# Altium PCB ade7753_relay.PcbDoc
Units mil, origin at the board's own origin, x right, y up, seen from the top; angles counter-clockwise.
Board outline 3900 x 2250 mil, 2 copper layers (Top Layer, Bottom Layer); 37 components, 53 nets, 112 pads, 0 vias.
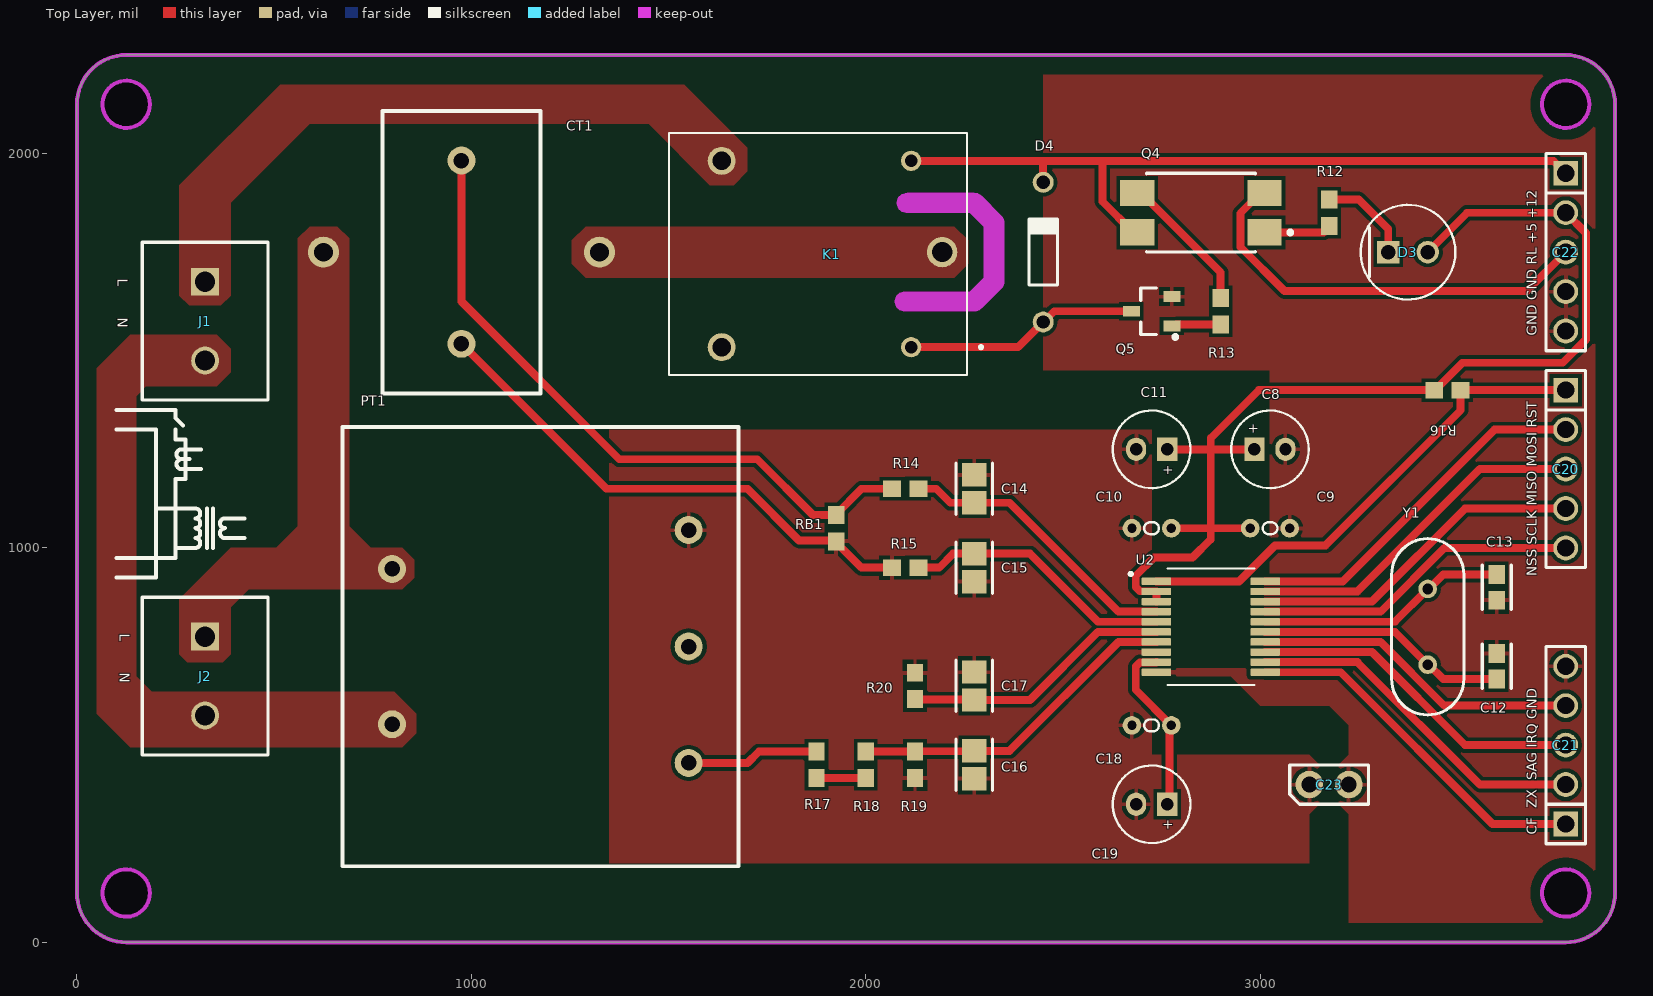
[diagram p0: Top Layer view]
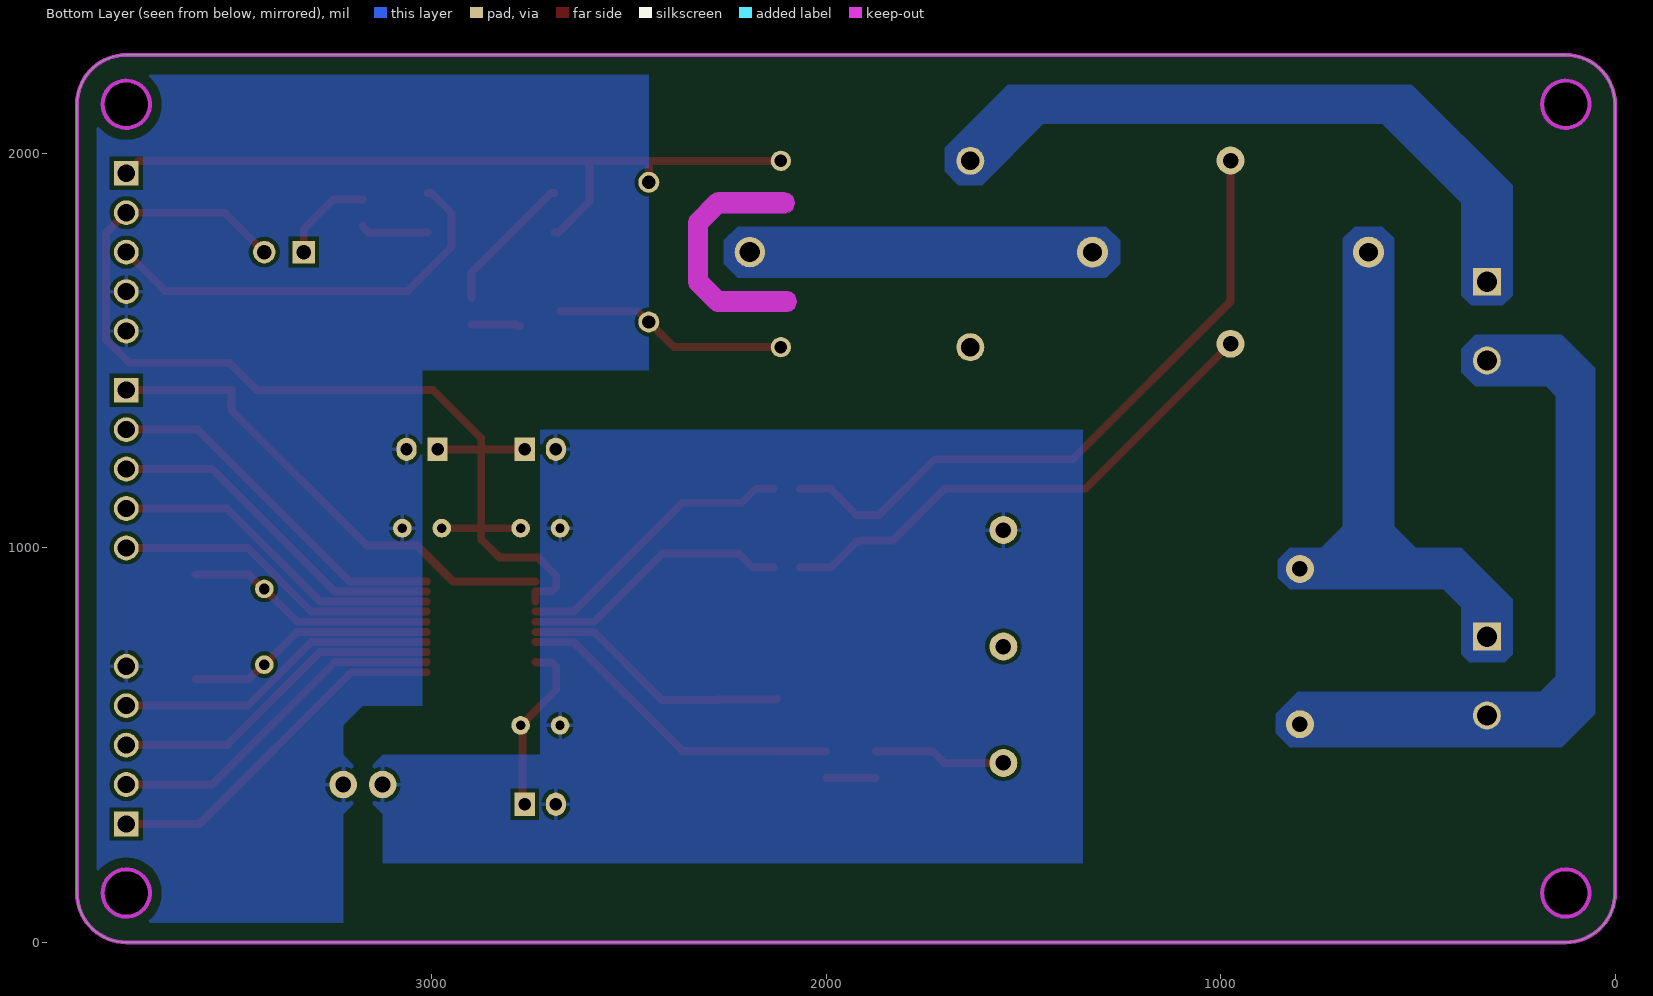
[diagram p1: Bottom Layer view, seen from below]
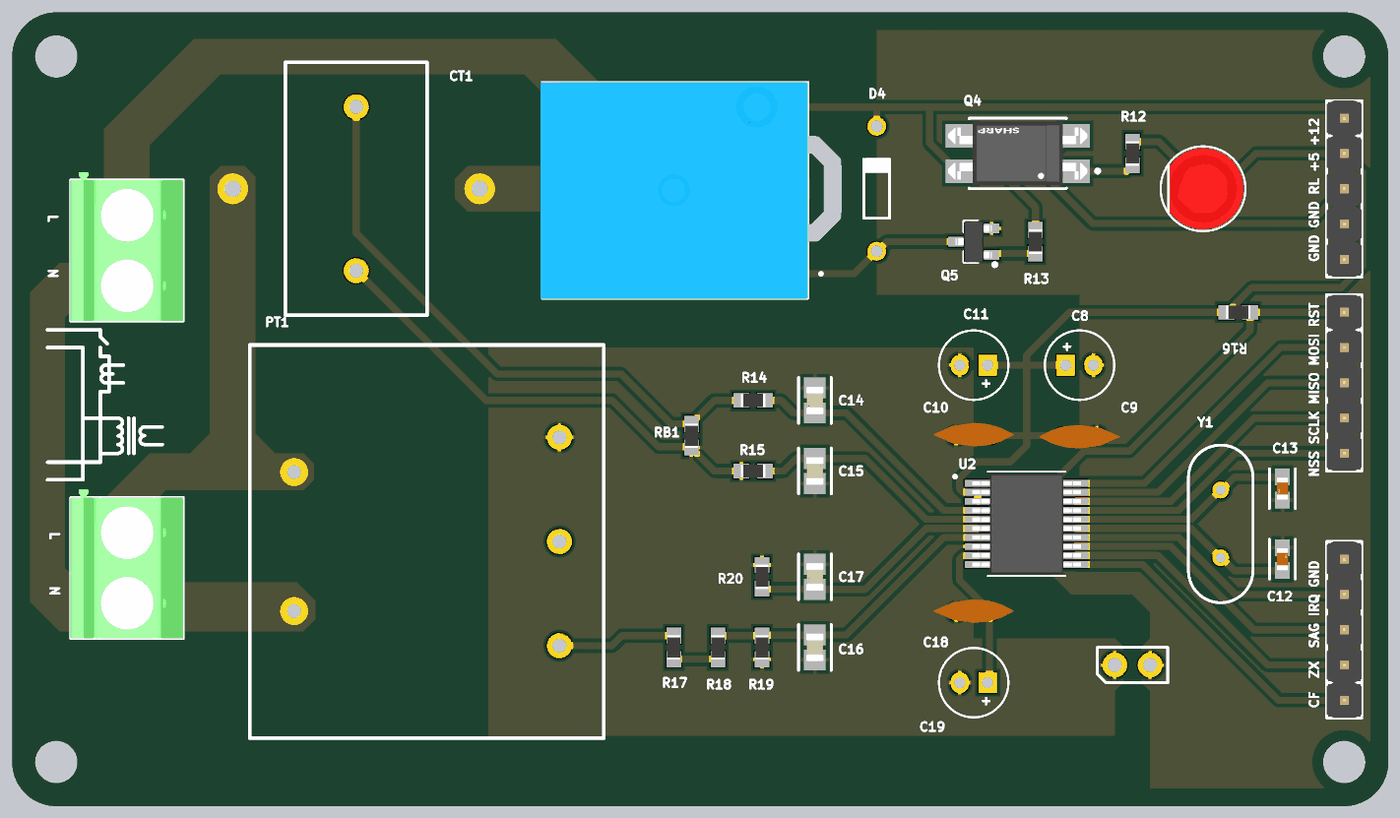
[diagram p2: 3D render of the assembled board from above, using the file's embedded part models]

## Layer stack, top to bottom
Top Solder: solder mask 0.4, Solder Resist, Dk 3.5
Top Layer: signal copper 1.4
Dielectric 1: dielectric 12.6, FR-4, Dk 4.8
Bottom Layer: signal copper 1.4
Bottom Solder: solder mask 0.4, Solder Resist, Dk 3.5

## Board outline
0,125 ccw(c125,125) 125,0 3775,0 ccw(c3775,125) 3900,125 3900,2125 ccw(c3775,2125) 3775,2250 125,2250 ccw(c125,2125) 0,2125
cut-out: 3715,125 ccw(c3775,125) 3775,65 ccw(c3775,125) 3835,125 ccw(c3775,125) 3775,185 ccw(c3775,125)
cut-out: 3715,2125 ccw(c3775,2125) 3775,2065 ccw(c3775,2125) 3835,2125 ccw(c3775,2125) 3775,2185 ccw(c3775,2125)
cut-out: 125,2065 cw(c125,2125) 65,2125 cw(c125,2125) 125,2185 cw(c125,2125) 185,2125 cw(c125,2125)
cut-out: 125,65 cw(c125,125) 65,125 cw(c125,125) 125,185 cw(c125,125) 185,125 cw(c125,125)
cut-out: 2100,1650.01 2264.64,1650.01 2299.99,1685.36 2299.99,1814.64 2264.64,1849.99 2105,1849.99 cw(c2105,1875) 2105,1900.01 2275,1900.01 cw(c2275,1875) 2292.69,1892.69 2342.69,1842.69 cw(c2325,1825) 2350.01,1825 2350.01,1675 cw(c2325,1675) 2342.69,1657.31 2292.69,1607.31 cw(c2275,1625) 2275,1599.99 2100,1599.99 cw(c2100,1625)

## Design rules (kind name [scope] priority, off if disabled: settings)
Clearance [All] p1: gap=5 ignorepadtopadclearanceinfootprint=TRUE except(10: Track-THPad Track-Poly SMDPad-Poly THPad-Poly Via-Poly; 30: Poly-Region)
HoleSize [All] p1: absolutevalues=TRUE maxlimit=150 minlimit=1 maxpercent=80.000 minpercent=20.000
MinimumSolderMaskSliver [All] p1: minsoldermaskwidth=1
PolygonConnect RELAY_COM [InNet('NetCT1_1')] p1: thpad.connectstyle=Direct thpad.reliefconductorwidth=10 thpad.reliefentries=4 thpad.polygonreliefangle="90 Angle" thpad.airgapwidth=10 smdpad.connectstyle=Relief smdpad.reliefconductorwidth=10 smdpad.reliefentries=4 smdpad.polygonreliefangle="90 Angle" smdpad.airgapwidth=10 via.connectstyle=Relief via.reliefconductorwidth=10 via.reliefentries=4 via.polygonreliefangle="90 Angle" via.airgapwidth=10
PolygonConnect RELAY_NO [InNet('NetJ1_1')] p2: thpad.connectstyle=Direct thpad.reliefconductorwidth=10 thpad.reliefentries=4 thpad.polygonreliefangle="90 Angle" thpad.airgapwidth=10 smdpad.connectstyle=Relief smdpad.reliefconductorwidth=10 smdpad.reliefentries=4 smdpad.polygonreliefangle="90 Angle" smdpad.airgapwidth=10 via.connectstyle=Relief via.reliefconductorwidth=10 via.reliefentries=4 via.polygonreliefangle="90 Angle" via.airgapwidth=10
PolygonConnect PT_1 [InNet('NetCT1_2')] p3: thpad.connectstyle=Direct thpad.reliefconductorwidth=10 thpad.reliefentries=4 thpad.polygonreliefangle="90 Angle" thpad.airgapwidth=10 smdpad.connectstyle=Relief smdpad.reliefconductorwidth=10 smdpad.reliefentries=4 smdpad.polygonreliefangle="90 Angle" smdpad.airgapwidth=10 via.connectstyle=Relief via.reliefconductorwidth=10 via.reliefentries=4 via.polygonreliefangle="90 Angle" via.airgapwidth=10
PolygonConnect PT_2 [InNet('NetJ1_2')] p4: thpad.connectstyle=Direct thpad.reliefconductorwidth=10 thpad.reliefentries=4 thpad.polygonreliefangle="90 Angle" thpad.airgapwidth=10 smdpad.connectstyle=Relief smdpad.reliefconductorwidth=10 smdpad.reliefentries=4 smdpad.polygonreliefangle="90 Angle" smdpad.airgapwidth=10 via.connectstyle=Relief via.reliefconductorwidth=10 via.reliefentries=4 via.polygonreliefangle="90 Angle" via.airgapwidth=10
PolygonConnect [All] p5: connectstyle=Relief reliefconductorwidth=10 reliefentries=4 polygonreliefangle="90 Angle" airgapwidth=10
RoutingVias [All] p1: holewidth=10 width=20 viastyle="Through Hole" minholewidth=5 minwidth=10 maxholewidth=20 maxwidth=50
SilkToSilkClearance [All] p1: silktosilkclearance=5
SilkToSolderMaskClearance [IsPad] p1: minsilkscreentomaskgap=5 clearancetoexposedcopper=TRUE
SolderMaskExpansion [All] p1: expansion=4 istentingtop=FALSE
Width [All] p1: maxlimit=100 minlimit=10 preferedwidth=20
26 further rules are at their usual default settings.

## Components (designator, comment, footprint, x,y, rotation, side; value= is the part's Value field where it differs from the comment)
C8 "10uF" CAP_ALUM_D050_S20_H110 3025,1250 r0 top value=106/50V
C9 "100nF" CAP_CER_TH100 3075,1050 r180 top value=104/50V
C10 "100nF" CAP_CER_TH100 2675,1050 r0 top value=104/50V
C11 "10uF" CAP_ALUM_D050_S20_H110 2725,1250 r180 top value=106/50V
C12 "22pF" FP-0603-L_1_6_0_15-W_0_81-IPC_A 3600,700 r90 top
C13 "22pF" FP-0603-L_1_6_0_15-W_0_81-IPC_A 3600,900 r270 top
C14 "33nF" FP-C0805C-DN-IPC_A 2275,1150 r90 top value="33,000 pF"
C15 "33nF" FP-C0805C-DN-IPC_A 2275,950 r270 top value="33,000 pF"
C16 "33nF" FP-C0805C-DN-IPC_A 2275,450 r270 top value="33,000 pF"
C17 "33nF" FP-C0805C-DN-IPC_A 2275,650 r90 top value="33,000 pF"
C18 "100nF" CAP_CER_TH100 2675,550 r0 top value=104/50V
C19 "10uF" CAP_ALUM_D050_S20_H110 2725,350 r180 top value=106/50V
C20 "SPI Debug" JP5-D1T 3775,1400 r270 top
C21 "ADE Output" JP5-D1T 3775,300 r90 top
C22 "Control" JP5-D1T 3775,1950 r270 top
C23 "GND Jumper" JP2-CLOSED 3125,400 r90 top
CT1 "ZMCT103C" ZMCT103C 975,1750 r270 top
D3 "Relay" FP-HLMP-4700-MFG 3375,1750 r0 top
D4 "1N4148" NXP-SOD27-2_V 2450,1750 r90 top
J1 "Load In" PHOE-1729128-2_V 325,1575 r270 top
J2 "Load Out" PHOE-1729128-2_V 325,675 r270 top
K1 "SRD-12VDC-SL-C" RELAY_SRD-12VDC-SL-C 1875,1745.28 r180 top
PT1 "ZN28120BA1" ZN28120BA1 1175,750 r0 top
Q4 "PC817XNNIP0F" FP-PC817XNNIP0F-MFG 2850,1850 r180 top
Q5 "2SC1815" SOT23_3 2725,1600 r180 top
R12 "1K" RESC1609X55X30ML15T15 3175,1850 r270 top
R13 "1K" RESC1609X55X30ML15T15 2900,1600 r270 top
R14 "1K" RESC1609X55X30ML15T15 2100,1150 r0 top
R15 "1K" RESC1609X55X30ML15T15 2100,950 r0 top
R16 "10K" RESC1609X55X30ML15T15 3475,1400 r180 top
R17 "47K" RESC1609X55X30ML15T15 1875,450 r90 top
R18 "47K" RESC1609X55X30ML15T15 2000,450 r270 top
R19 "1K" RESC1609X55X30ML15T15 2125,450 r90 top
R20 "1K" RESC1609X55X30ML15T15 2125,650 r270 top
RB1 "10R" RESC1609X55X30ML15T15 1925,1050 r270 top
U2 "ADE7753ARSZ" SOP65P780X200-20N 2875,800 r0 top
Y1 "3.58 MHz" FOX-FOXSLF-2_V 3425,800 r90 top

## Footprints (in the part's own frame and the unit in brackets; to place one, negate y for a bottom-side part, rotate by r counter-clockwise, add the part's x,y. Pads: shape width x height; smd on the part's side, far side on the other; paste and mask are expansions set on the pad)
CAP_ALUM_D050_S20_H110 [mm]
  rect 1.3x1.5 hole 0.8: 1(-1,0)
  oval 1.3x1.5 hole 0.8: 2(1,0)
  silkscreen extent -2.5,-2.5 2.5,2.5, body extent -2.5,-2.5 2.5,2.5, height 11
CAP_CER_TH100 [mm] "Ceramic Cap, 10,18,22,27,33pF"
  round 1.2 hole 0.6: 1(0,0) 2(2.54,0)
  silkscreen extent 0.79,-0.38 1.74,0.38, body extent -1.65,-0.77 4.19,0.92, height 6.12
FOX-FOXSLF-2_V [mm] "THD, 2-Leads, Body 11.35x4.65mm, Pitch 4.88mm"
  round 1.2 hole 0.7: 1(-2.44,0) 2(2.44,0)
  silkscreen extent -5.68,-2.32 5.68,2.32, body extent -5.67,-2.32 5.68,2.32, height 3.6
FP-0603-L_1_6_0_15-W_0_81-IPC_A [mil]
  rect 47.5x42.06 smd paste+0 mask+0: 1(-32.51,0) 2(32.51,0)
  silkscreen extent -56,-37 56,37, body extent -76,-41 76,41, height 10
FP-C0805C-DN-IPC_A [mil]
  rect 59.24x61.27 smd paste+0 mask+0: 1(-35.46,0) 2(35.46,0)
  silkscreen extent -65,-46 65,46, body extent -85,-50 85,50, height 10
FP-HLMP-4700-MFG [mm]
  rect 1.45x1.45 hole 0.95 paste-1000 mask+0: 1(-1.27,0)
  round 1.45 hole 0.95 paste-1000 mask+0: 2(1.27,0)
  silkscreen extent -3.05,-3.05 3.05,3.05, body extent -3.15,-3.15 3.15,3.15, height 0.25
FP-PC817XNNIP0F-MFG [mm]
  rect 2.2x1.7 smd paste+0 mask+0: 1(-4.1,1.27) 2(-4.1,-1.27) 3(4.1,-1.27) 4(4.1,1.27)
  silkscreen extent -5.88,-2.54 3.5,2.54, body extent -5.3,-2.64 5.3,2.64, height 0.25
JP2-CLOSED [mil]
  round 70 hole 40: 1(0,0) 2(0,-100)
  silkscreen extent -50,-150 50,50, body extent -50,-152 50,50, height 300
JP5-D1T [mm] "5 pins, 1 row, straight, gold plating"
  rect 1.6x1.6 hole 1.1: 1(0,0)
  round 1.6 hole 1.1: 2(2.54,0) 3(5.08,0) 4(7.62,0) 5(10.16,0)
  silkscreen extent -1.27,-1.27 11.43,1.27, body extent -1.27,-1.27 11.43,1.27, height 8.54
NXP-SOD27-2_V [mm] "SOD27, 2-Leads, Dia 1.85mm, Body Length 4.25mm, Pin Spacing 9mm"
  round 1.35 hole 0.85: 1(-4.5,0) 2(4.5,0)
  silkscreen extent -2.12,-0.92 2.13,0.93, body extent -4.78,-0.92 4.78,0.92, height 1.84
PHOE-1729128-2_V [mm] "Receptacle, 2-Leads, Body 8.1x10.16mm, Pitch 5.08mm"
  rect 1.8x1.8 hole 1.3: 1(-2.54,0)
  round 1.8 hole 1.3: 2(2.54,0)
  silkscreen extent -5.08,-4.05 5.08,4.05, body extent -5.65,-4.05 5.08,4.05, height 10.01
RELAY_SRD-12VDC-SL-C [mm]
  round 1.308 hole 0.8: COIL1(-6.1,6) COIL2(-6.1,-6)
  round 1.95 hole 1.3: COM(-8.1,-0.12)
  round 1.8 hole 1.2: NC(6.1,6) NO(6.1,-6)
  silkscreen extent -10.7,-7.8 9.5,7.8, body extent -9.6,-7.8 9.6,7.8, height 15.8
RESC1609X55X30ML15T15 [mm] "Chip Resistor, 2-Leads, Body 1.75x0.95mm, IPC Low Density"
  rect 1.15x1.05 smd: 1(-0.85,0) 2(0.85,0)
  body extent -0.87,-0.48 0.87,0.48, height 0.55
SOP65P780X200-20N [mm]
  rrect25% 1.9x0.48 smd: 1(-3.505,2.925) 2(-3.505,2.275) 3(-3.505,1.625) 4(-3.505,0.975) 5(-3.505,0.325) 6(-3.505,-0.325) 7(-3.505,-0.975) 8(-3.505,-1.625) 9(-3.505,-2.275) 10(-3.505,-2.925) 11(3.505,-2.925) 12(3.505,-2.275) 13(3.505,-1.625) 14(3.505,-0.975) 15(3.505,-0.325) 16(3.505,0.325) 17(3.505,0.975) 18(3.505,1.625) 19(3.505,2.275) 20(3.505,2.925)
  silkscreen extent -5.25,-3.75 2.8,3.75, body extent -3.9,-3.6 3.9,3.6, height 2
SOT23_3 [mm] "SOT23, 3-Leads, Body 2,90x2,30mm, Pitch 0,95mm, IPC Medium Density"
  rect 1.1x0.7 smd: 1(-1.3,0.95) 2(-1.3,-0.95) 3(1.3,0)
  silkscreen extent -1.65,-1.5 0.7,1.78, body extent -1.3,-1.5 1.3,1.5, height 1.1
ZMCT103C [mm]
  round 2 hole 1.2: 1(0,8.89) 2(0,-8.89)
  round 1.8 hole 1: 3(-5.9,0) 4(5.9,0)
  silkscreen extent -9.1,-5.1 9.1,5.1
ZN28120BA1 [mm]
  round 1.8 hole 1: 1(-9.55,5) 2(-9.55,-5.006) 3(9.55,-7.5) 4(9.55,0) 5(9.55,7.5)
  silkscreen extent -12.75,-14.15 12.75,14.15

## Part data
C8 C11 C19: library part 106CKR050M, "CAP ALUM 10uF 50V 20% RADIAL", Category=CAPACITOR, CompanyID=VT-00054, MPN=106CKR050M, PinCount=2, Solder=WAVE
C9 C10 C18: library part K104Z15Y5VF5TL2, "CAP CER 0.1uF -20 +80% 50V Y5V RADIAL", Category=CAPACITOR, CompanyID=VT-00189, MPN=K104Z15Y5VF5TL2, PinCount=2, Solder=WAVE
C12 C13: library part CMP-2006-04207-3, "General Purpose Ceramic Capacitor, 0603, 22pF, 5%, NP0, 30ppm/°C, 50V", Case Code (Imperial)=0603, Case Code (Metric)=1608, Dielectric=C0G, Dielectric Material=Ceramic, Insulation Resistance=100GR, Max Operating Temperature=125°C, Min Operating Temperature=-55°C, Package Quantity=1, Temperature Coefficient=30ppm/°C, Tolerance=5%, Voltage=50V, Capacitance=22pF, Case/Package=0603, Contact Plating=Tin, Depth=0.81mm, Height=0.63mm, Lead Free="Lead Free", Length=1.6mm, Mount="Surface Mount", Number of Pins=2, Packaging="Tape and Reel", Radiation Hardening=No, REACH SVHC="No SVHC", RoHS Compliant=Yes, Termination=SMD/SMT, Thickness=0.035inch, Voltage Rating=50V, Voltage Rating (DC)=50V, Width=0.81mm
C14 C15 C16 C17: library part CMP-2007-00375-2, "CAP CER 0.033UF 50V X7R 0805", Capacitance="33,000 pF", Manufacturer=KEMET, Manufacturer Part Number=C0805C333K5RACTU, Package=C0805C-DN, Temperature="-55°C to +125°C", Temperature Characteristic=X7R, Temperature Coefficient=30ppm/°C, Temperature Range High=+125°C, Temperature Range Low=-55°C, Tolerance=0.1, Voltage Rating="50 V", Automotive=No, Category=Cap, ComponentLink2Description=Datasheet, ComponentLink2URL=https://content.kemet.com/datasheets/KEM_C1003_C0G_SMD.pdf, Device Class L1="Passive Components", Device Class L2=Capacitors, Device Class L3="Ceramic Capacitors", Digikey Description="CAP CER 0.033UF 50V X7R 0805", Height=0.88mm, Ipc Land Pattern Name=CAPC200125X78, Lead Free=Yes, Material=Ceramic, Mouser Description="Multilayer Ceramic Capacitors (MLCC) - SMD/SMT 50volts 33000pF X7R 10%", Octopart=https://octopart.com/c0805c333k5ractu-kemet-142441, RoHS=TRUE
C20 C21 C22: library part JP5, "WR-PHD 2.54 mm Angled Socket Header", Manufacturer="W¨¹rth Elektronik eiSos GmbH", partNo=613005143121, ComponentLink1 Description=Manufacturer, ComponentLink1URL=http://www.we-online.com, ComponentLink2 Description=Datasheet, ComponentLink2URL=http://katalog.we-online.de/em/datasheet/6130xx143121.pdf, Created by="Karrer Zheng", Created Date="29 March 2013", NoPins=05
C23: library part JP2, "WR-PHD 2.54 mm Angled Socket Header", Manufacturer="W¨¹rth Elektronik eiSos GmbH", partNo=613002143121, ComponentLink1 Description=Manufacturer, ComponentLink1URL=http://www.we-online.com, ComponentLink2 Description=Datasheet, ComponentLink2URL=http://katalog.we-online.de/em/datasheet/6130xx143121.pdf, Created by="Karrer Zheng", Created Date="29 March 2013", NoPins=02
CT1: "ZMCT103C Current Transformer 1000:1 5A/5mA"
D3: library part CMP-18399-000008-1, "LED RED DIFFUSED T-1 3/4 T/H", Colour=Red, Forward Current=2mA, Forward Voltage=1.7V, Manufacturer=Broadcom, Manufacturer Part Number=HLMP-4700, Power Dissipation=14mW, Reverse Voltage=5V, Temperature="-40°C to +100°C", Temperature Range High=+100°C, Temperature Range Low=-40°C, Automotive=No, Category=Diode, ComponentLink2Description=Datasheet, ComponentLink2URL=https://docs.broadcom.com/docs/AV02-1557EN, Device Class L1=Optoelectronics, Device Class L2=LEDs, Device Class L3=unset, Digikey Description="LED RED DIFFUSED T-1 3/4 T/H", Lead Free=Yes, Led Orientation=Straight, Luminous Intensity=2.3mcd, Mouser Description="LED; Red; 2.3mcd; 0.24In.Dia.; T-1-3/4; 500mA; 1.7V; 635nm; 50deg; 5V; 24mW; -55degC;", Octopart=https://octopart.com/hlmp-4700-broadcom-71130526, Package=HLMP-4700, Peak Emmision Wavelength=635nm, RoHS=TRUE, Viewing Angle=50°, Wavelength=626nm
D4: library part CMP-0648-00002-1, "High-speed Diode, 100 V, 450 mA, 2-Pin SOD27, RoHS", Manufacturer="NXP Semiconductors", Cd="4 pF Max.", ComponentLink1Description="Manufacturer URL", ComponentLink1URL=http://www.nxp.com/, ComponentLink2Description=Datasheet, ComponentLink2URL=http://www.nxp.com/documents/data_sheet/1N4148_1N4448.pdf, ComponentLink3Description="Package Specification", ComponentLink3URL=http://www.nxp.com/documents/data_sheet/1N4148_1N4448.pdf, Configuration=Single, DatasheetVersion=Aug-04, IF="200 mA Max.", IFRM="450 mA", IFSM="4 A Max.", IR (VR="20 V)=25 nA", Mounting Technology="Through Hole", PackageDescription="2-Pin Hermetically Sealed Glass Package, Axial Leaded, Dia 1.85 mm, Body Length 4.25 mm, Lead Spread 25.4 mm", PackageReference=SOD27, PackageVersion=Aug-04, PartNumber=1N4148, RoHS=TRUE, Trr="4 ns Max.", VF (IF="10 mA)=1 V", VR="100 V Max."
J1 J2: library part CMP-2000-05815-1, "PCB Terminal Block, 13.5 A, 400 V, 2-Pin THD, RoHS, Bulk", Current Rating=13500mA, Manufacturer="Phoenix Contact", Package Description="2-Pin Through Hole Device, Body 8.1 x 10.16 mm, Pitch 5.08 mm", Package Reference=1729128-2, Package Version=03/2015, PartNumber=1729128, Voltage Rating=400V, Datasheet URL=https://datasheet.ciiva.com/16046/1729128-16046181.pdf, Datasheet Version=12/2013, Manufacturer URL=http://www.phoenixcontact.com/, Mounting Technology=ThroughHole, No. of Positions=2, No. of Rows=1, Orientation=Horizontal, Package URL=https://www.phoenixcontact.com/online/portal/pi/pxc/product_detail_page/!ut/p/b1/3VdJjqNKFDxLH8AFycySyWY2ozFsEPOMMQaDOX1XedGL_1Vdm5YXJleknhSKeBkvI6EA8ncAo3AYoDhBQGco6KN7VURTdemj9us_IEKEZo_YHiPAEWEFmDGOHMORkqKYCORBZxgL7ZoaZYcbFFUZ3fqxSY6GOuxydWUuHqz1ynmMFygu583Bob0Ewr6Sd_l-5m-kAueHiB0jpRwZwe58wwtkpxtMYd_LmGcDRU02dRNEyWt6Y2ti5pSyJ_reIkzIulrqApdnbT11V5jnCKbYNCvhEM1MCpPByat_X379-iThf08CI5GfOPqfBeS3BRoBOdD55AKVv0iLwCMq-2BrzXWSGRH7pUGD9uwXQjiph3xL0DKQwdGa0JImiIOmBNOestqgwTHSSs2oOep-78apyXQBvNi8ZLaFjvjWvcaUEBu0MC6Wbe-d6mB0FAebo2lUWinqYaZs5DAYzV0RP9yitUjnGJ0iI9xhZkT42OCQNUJJhkgWINNQLP2JFP6OpMg3JCVg70jqHT0lvKOnhHf0lPuOnnLf0VPuWx6_dxwUIvwk5WMkT0kLL1mh61l2yZVSzG3pYV_bqo-mj6uMKwKwdnnW8Jh5RTOJzMOA5c-eJDaZQw4mTMPH02PvS_ZAqNVjVTo2WyYLkwH_KU1mmmG5kjRhDqPXLwwVHvVOjCM60-fpXvTDfMGW1PVFVS1r4e4yVDk4ZdNbkUHvqPqQSeian4UD39fNKmachqdJ1NJbyk8rXT9mXTvPk3oE5meulKGgiruPJek-4I9hTT6G8ZLOyRSm2RRVbThERQad5OS28hdt4YW4vG0stgYYzsWsK4_7y6DZMjJSCqri1kyiZR5vD7pwIrNR7QwPHTcLTI5qT7eRlpHrdGiupYlqQDJ7zy_CND8fWWBoLRXxk1RVcXiBQwbTD4Xi7KL-FuO94t9xaqweXzH, Packing=Bulk, Pitch=5.08mm, RoHS=TRUE
K1: "General Purpose Non Latching 12VDC SPDT Through Hole Relays RoHS", Package=None, Availability=Unavailable, MF="{'manufacturer': u'Songle Relay'}", MP=SRD-12VDC-SL-C, Price=None
PT1: library part "EI28 ZN28120BA1", "220VAC / 12VAC EI28 ZN28120BA1"
Q4: library part CMP-65434-000005-1, "OPTOISOLATOR 5KV TRANS 4SMD", Case/Package=SMD/SMT, Collector Emitter Saturation Voltage=200mV, Collector Emitter Voltage (VCEO)=80V, Forward Current=50mA, Forward Voltage=1.4V, Isolation Voltage=5kV, Max Operating Temperature=100°C, Max Power Dissipation=200mW, Min Operating Temperature=-30°C, Output Current per Channel=30mA, Package Quantity=2000, Reverse Breakdown Voltage=6V, Collector-emitter Voltage-Max=200mV, Contact Plating=Copper, Fall Time=18000ns, Input Current=50mA, Input Type=DC, Isolation Voltage-Max=5kV, Lead Free="Lead Free", Max Collector Current=50mA, Max Input Current=50mA, Max Output Voltage=80V, Mount="Surface Mount", Number of Channels=1, Number of Elements=1, Number of Pins=4, Output Voltage=80V, Packaging="Tape and Reel", Power Dissipation=200mW, Radiation Hardening=No, Rise Time=18000ns, RoHS Compliant=Yes
Q5: "TRANS NPN 50V 0.15A SOT23-3", MPN=2SC1815, Solder=SMT
R12 R13 R14 R15 R16 R17 R18 R19 R20 RB1: library part CMP-1012-00623-3, "Chip Resistor, 10 KOhm, +/- 1%, 0.1 W, -55 to 155 degC, 0603 (1608 Metric), RoHS, Tape and Reel", Case Code (Imperial)=0603, Case Code (Metric)=1608, Manufacturer=Panasonic, Max Operating Temperature=155degC, Max Power Dissipation=100mW, Min Operating Temperature=-55degC, Package Description="2-Pin Surface Mount Device, Body 1.6 x 0.85 mm", Package Quantity=1, Package Reference=603, Resistance=10KOhm, Temperature Coefficient=100ppm\/degreesC, Tolerance=1%, Voltage Rating=75V, Case\/Package=0603, Composition=ThickFilm, Contact Plating=Tin, Datasheet URL=https://industrial.panasonic.com/cdbs/www-data/pdf/RDA0000/AOA0000C304.pdf, Datasheet Version=02/2017, Depth=0.8mm, Height=0.45mm, Lead Free=LeadFree, Length=1.6mm, Manufacturer URL=http://www.panasonic.com/, Military Standard=Not, Mount=SurfaceMount, Mounting Technology=SurfaceMount, Number of Pins=2, Number of Terminations=2, Packaging=TapeandReel, Power Rating=100mW, Radiation Hardening=No, REACH SVHC=NoSVHC, RoHSCompliant=true, Termination=SMD/SMT, Voltage Rating (DC)=75V, Width=0.031inch
U2: "Single Phase Multifunction Metering IC 20-Pin SSOP Tube", Package=None, Availability=Unavailable, MF="{'manufacturer': u'Analog Devices'}", MP=ADE7753ARSZ, Price=None
Y1: library part CMP-1749-00004-1, "Resistance Weld Thru-Hole Crystal, 12 MHz, +/-30 ppm, -20 to 70 degC, 2-Pin THD, RoHS, Bulk", Case\Package=TO-251-3, Input Capacitance="350 pF", Max Operating Temperature="150 degC", Max Power Dissipation="2.5 W", Min Operating Temperature="-55 degC", Package Quantity=70, ComponentLink1Description="Manufacturer URL", ComponentLink1URL=http://www.foxonline.com/, ComponentLink2Description=Datasheet, ComponentLink2URL=http://www.foxonline.com/pdfs/hc49slf.pdf, DatasheetVersion=Mar-15, Elements=1, Height="6.1 mm", Length="6.6 mm", Mount="Through Hole", PackageDescription="2-Pin Through Hole Device, Body 11.35 x 4.65 mm, Pitch 4.88 mm", PackageReference=FOXSLF-2, Packaging=Rail/Tube, Pins=3, Radiation Hardening=No, Rds On Max="115 mohm", REACH SVHC="No SVHC", RoHSCompliant=true, Typical Rise Time="90 ns", Width="2.3 mm"

## Nets (pads, with @x,y where several pads share a name; then routed paths per layer and width w, separated by ;. In a path a pad name is that pad's centre, name@x,y a point inside that pad or via, vN(x,y) a via of type N, cw(c..) or ccw(c..) an arc to the next point about the centre after c; other vN are vias at no path point)
+3: 
+5: 
+12: C22.1 D4.2 K1.COIL2 Q4.4 | length 1951.2
  Top Layer w20: K1.COIL2 2450,1981.5 ; D4.2 2450,1981.5 ; Q4.4 2678.74,1800 2600,1878.74 2600,1981.5 ; C22.1 3743.5,1981.5 2600,1981.5 ; 2450,1981.5 2600,1981.5
ADE_RST: C20.1 R16.1 U2.1 | length 1270.5
  Top Layer w20: U2.1 2946.31,915.16 3037.53,1006.38 3165.51,1006.38 3508.46,1349.33 R16.1 ; R16.1@3506.5,1400 C20.1
AGND: C10.1 C11.2 C14.2 C15.2 C16.2 C17.2 C18.1 C19.2 C23.1 CT1.4 PT1.5 R15.1 R19.1 R20.1 RB1.2 U2.8 | length 1328.7
  Top Layer w20: CT1.4 1342.72,1150 1700,1150 1831.05,1018.95 1914.33,1018.95 1916.75,1016.54 RB1.2 ; RB1.2@1923.03,1016.54 1989.57,950 R15.1
BUTTON: 
CF: C21.1 U2.11 | length 921.4
  Top Layer w20: U2.11 3204.53,684.84 3589.37,300 C21.1
CFG0: 
CFG1: 
CLKIN: C12.1 U2.15 Y1.1 | length 636.6
  Top Layer w20: U2.15 3341.73,787.2 Y1.1 3427.93,703.94 3464.38,667.49 C12.1
CLKOUT: C13.1 U2.16 Y1.2 | length 636.6
  Top Layer w20: U2.16 3341.73,812.8 Y1.2 3427.93,896.06 3464.38,932.51 C13.1
GND: C8.2 C9.1 C12.2 C13.2 C21.5 C22.4 C22.5 C23.2 Q5.2 U2.10
IRQ: C21.4 U2.14 | length 829
  Top Layer w20: U2.14 3305.63,761.61 3467.25,600 C21.4
LED_IND: 
MCLR/VPP: 
MISO: C20.3 U2.19 | length 890.6
  Top Layer w20: U2.19 3246.66,889.57 3557.1,1200 C20.3
MOSI: C20.2 U2.20 | length 921.4
  Top Layer w20: U2.20 3209.46,915.16 3594.3,1300 C20.2
NetC18_2: C18.2 C19.1 U2.9 | length 448.1
  Top Layer w20: U2.9 2736.46,709.88 2695.37,709.88 2684.61,699.12 2684.61,640.39 C18.2 2769.79,544.79 2769.79,355.42 C19.1
NetCT1_1: CT1.1 K1.COM
NetCT1_2: CT1.2 J2.1 PT1.1
NetCT1_3: CT1.3 R14.1 RB1.1 | length 1699.9
  Top Layer w20: CT1.3 975,1625 1375,1225 1725,1225 1866.54,1083.46 RB1.1 ; RB1.1@1925,1085.43 1989.57,1150 R14.1
NetD1_1: 
NetD2_2: 
NetD3_1: D3.1 R12.1 | length 239.6
  Top Layer w20: R12.1 3250.08,1883.46 3325,1808.54 D3.1
NetD4_1: D4.1 K1.COIL1 Q5.3 | length 596.3
  Top Layer w20: K1.COIL1 2386.22,1509.06 D4.1 2451.13,1572.83 2478.29,1600 Q5.3
NetD5_2: 
NetJ1_1: J1.1 K1.NO
NetJ1_2: J1.2 J2.2 PT1.2
NetPT1_3: PT1.3 R17.2 | length 335.9
  Top Layer w20: PT1.3 1700.17,454.72 1728.91,483.46 R17.2
NetQ4_1: Q4.1 R12.2 | length 171.6
  Top Layer w20: Q4.1 3160.43,1800 3175,1814.57 R12.2
NetQ4_3: Q4.3 R13.1 | length 359.9
  Top Layer w20: Q4.3 2698.43,1900 2900,1698.43 R13.1
NetQ5_1: Q5.1 R13.2 | length 125.4
  Top Layer w20: Q5.1 2784.06,1562.6 2787.99,1566.54 R13.2
NetR17_1: R17.1 R18.2 | length 125
  Top Layer w20: R17.1 R18.2
NSS: C20.5 U2.17 | length 829
  Top Layer w20: U2.17 3305.63,838.39 3467.25,1000 C20.5
P_RST: 
P_RX: 
P_TX: 
PGC: 
PGD: 
PK_VDD: 
RELAY: C22.3 Q4.2 | length 1080
  Top Layer w20: Q4.2 3001.57,1900 2950,1848.43 2950,1763.43 3061.98,1651.46 3676.46,1651.46 C22.3
SAG: C21.3 U2.13 | length 859.8
  Top Layer w20: U2.13 3283.87,736.02 3519.89,500 C21.3
SCLK: C20.4 U2.18 | length 859.8
  Top Layer w20: U2.18 3283.87,863.98 3519.89,1100 C20.4
V1N: C15.1 R15.2 U2.5 | length 689.8
  Top Layer w20: R15.2 2186.1,950 2221.57,985.46 C15.1 2416.56,985.46 2589.23,812.8 U2.5
V1P: C14.1 R14.2 U2.4 | length 732.6
  Top Layer w20: R14.2 2178.9,1150 2214.37,1114.54 C14.1 2364.82,1114.54 2640.97,838.39 U2.4
V2N: C17.1 R20.2 U2.6 | length 684.4
  Top Layer w20: R20.2 2126,615.54 2274,615.54 C17.1 2416.56,614.54 2589.23,787.2 U2.6
V2P: C16.1 R18.1 R19.2 U2.7 | length 852.2
  Top Layer w20: R18.1 R19.2 2126,484.46 2274,484.46 C16.1 2364.82,485.46 2640.97,761.61 U2.7
VCC: C8.1 C9.2 C10.2 C11.1 C22.2 D3.2 R16.2 U2.2 U2.3 | length 2807
  Top Layer w20: U2.3 U2.2 2736.46,890.12 2695.37,890.12 2684.61,900.88 2684.61,929.44 2730.75,975.58 2828.86,975.58 2875,1021.72 2875,1050 ; C11.1 2875,1250 ; C10.2 2875,1050 ; C9.2 2875,1050 ; C8.1 2875,1250 ; D3.2 3525,1850 C22.2 3826.5,1798.5 3826.5,1528.67 3767.5,1469.67 3513.17,1469.67 3443.5,1400 2996.72,1400 2875,1278.28 2875,1250 ; 2875,1050 2875,1250
VDD: 
Z_RST: 
Z_RX: 
Z_TX: 
ZX: C21.2 U2.12 | length 890.6
  Top Layer w20: U2.12 3246.66,710.43 3557.1,400 C21.2
pads on no net: K1.NC PT1.4

## Polygon pours and split planes (outlines as drawn)
AGND on Top Layer "Top Layer-AGND" (solid, pour order 13): 3150,350 3150,450 3125,475 2725,475 2725,1300 1350,1300 1350,200 3125,200 3125,325
NetJ1_2 on Top Layer "NETJ1_2_L01_P031" (solid, pour order 31): 860,580 860,530 825,495 135,495 50,580 50,1455 135,1540 355,1540 390,1505 390,1445 355,1410 175,1410 150,1385 150,675 190,635 805,635
NetCT1_2 on Top Layer "Top Layer-NetCT1_2" (solid, pour order 39): 435,895 825,895 855,925 855,970 825,1000 745,1000 690,1055 690,1785 660,1815 590,1815 560,1785 560,1055 505,1000 390,1000 260,870 260,730 280,710 370,710 390,730 390,850
NetJ1_1 on Top Layer "NETJ1_1_L01_P022" (solid, pour order 22): 590,2075 1450,2075 1605,1920 1665,1920 1700,1955 1700,2015 1540,2175 515,2175 260,1920 260,1640 285,1615 365,1615 390,1640 390,1875
GND on Top Layer "Top Layer-GND" (solid, pour order 9): 3000,600 3175,600 3225,550 3225,475 3200,450 3200,350 3225,325 3225,50 3850,50 3850,2200 2450,2200 2450,1450 3025,1450 3025,695 2750,695 2750,675 2925,675
NetCT1_1 on Top Layer "Top Layer-NetCT1_1" (solid, pour order 21): 1255,1720 1290,1685 2225,1685 2260,1720 2260,1780 2225,1815 1290,1815 1255,1780
AGND on Bottom Layer "Bottom Layer-AGND" (solid, pour order 15): 3150,350 3150,450 3125,475 2725,475 2725,1300 1350,1300 1350,200 3125,200 3125,325
NetJ1_2 on Bottom Layer "NETJ1_2_L02_P040" (solid, pour order 40): 860,580 860,530 825,495 135,495 50,580 50,1455 135,1540 355,1540 390,1505 390,1445 355,1410 175,1410 150,1385 150,675 190,635 805,635
NetCT1_2 on Bottom Layer "Bottom Layer-NetCT1_2" (solid, pour order 41): 435,895 825,895 855,925 855,970 825,1000 745,1000 690,1055 690,1785 660,1815 590,1815 560,1785 560,1055 505,1000 390,1000 260,870 260,730 280,710 370,710 390,730 390,850
NetJ1_1 on Bottom Layer "NETJ1_1_L02_P042" (solid, pour order 42): 590,2075 1450,2075 1605,1920 1665,1920 1700,1955 1700,2015 1540,2175 515,2175 260,1920 260,1640 285,1615 365,1615 390,1640 390,1875
NetCT1_1 on Bottom Layer "Top Layer-NetCT1_1" (solid, pour order 34): 1255,1720 1290,1685 2225,1685 2260,1720 2260,1780 2225,1815 1290,1815 1255,1780
GND on Bottom Layer "Bottom Layer-GND" (solid, pour order 14): 3025,600 3175,600 3225,550 3225,475 3200,450 3200,350 3225,325 3225,50 3850,50 3850,2200 2450,2200 2450,1450 3025,1450 3025,695

## Keep-outs
Keep-Out Layer:
  circle w10: c3775,125 r60
  circle w10: c3775,2125 r60
  circle w10: c125,2125 r60
  circle w10: c125,125 r60
  lines w10: 0,125 ccw(c125,125) 125,0 3775,0 ccw(c3775,125) 3900,125 3900,2125 ccw(c3775,2125) 3775,2250 125,2250 ccw(c125,2125) 0,2125 0,125
  lines w50: 2100,1625 2275,1625 2325,1675 2325,1825 2275,1875 2105,1875

## Silkscreen, mask and mechanical layers (free items; w line width, h text height)
Top Overlay:
  lines w10: 100,925 200,925 200,1300 100,1300 ; 100,975 250,975 250,1175 275,1175 275,1275 250,1275 250,1300 ; 100,1350 250,1350 250,1330 269.3,1310.7 ; 200,1100 300,1100 cw(c300,1087.5) 300,1075 cw(c300,1062.5) 300,1050 cw(c300,1037.5) 300,1025 cw(c300,1012.5) 300,1000 250,1000 ; 285,1225 265,1225 ; 315,1200 265,1200 cw(c265,1212.5) 265,1225 ; 315,1250 265,1250 ccw(c265,1237.5) 265,1225 ; 330,1000 330,1100 ; 345,1000 345,1100 ; 425,1025 375,1025 cw(c375,1037.5) 375,1050 cw(c375,1062.5) 375,1075 425,1075
  text "L       N" at 103,1682 h25 r270
  text "GND GND RL +5 +12" at 3702,1538 h25 r90
  text "NSS SCLK MISO MOSI RST" at 3702,928 h25 r90
  text "L       N" at 108,782 h25 r270
  text "CF  ZX  SAG IRQ GND" at 3702,273 h25 r90

## Text inside footprints (layer, text, board x,y; h text height)
C8: Top Overlay "+" at 2968.9,1292.32 h25
C11: Top Overlay "+" at 2781.1,1207.68 h25 r180
C19: Top Overlay "+" at 2781.1,307.68 h25 r180